# Altium PCB HygroPCB.PcbDoc
Units mil, origin at the board's own origin, x right, y up, seen from the top; angles counter-clockwise.
Board outline 1945 x 1130 mil, 2 copper layers (Top Layer, Bottom Layer); 5 components, 8 nets, 28 pads, 0 vias.
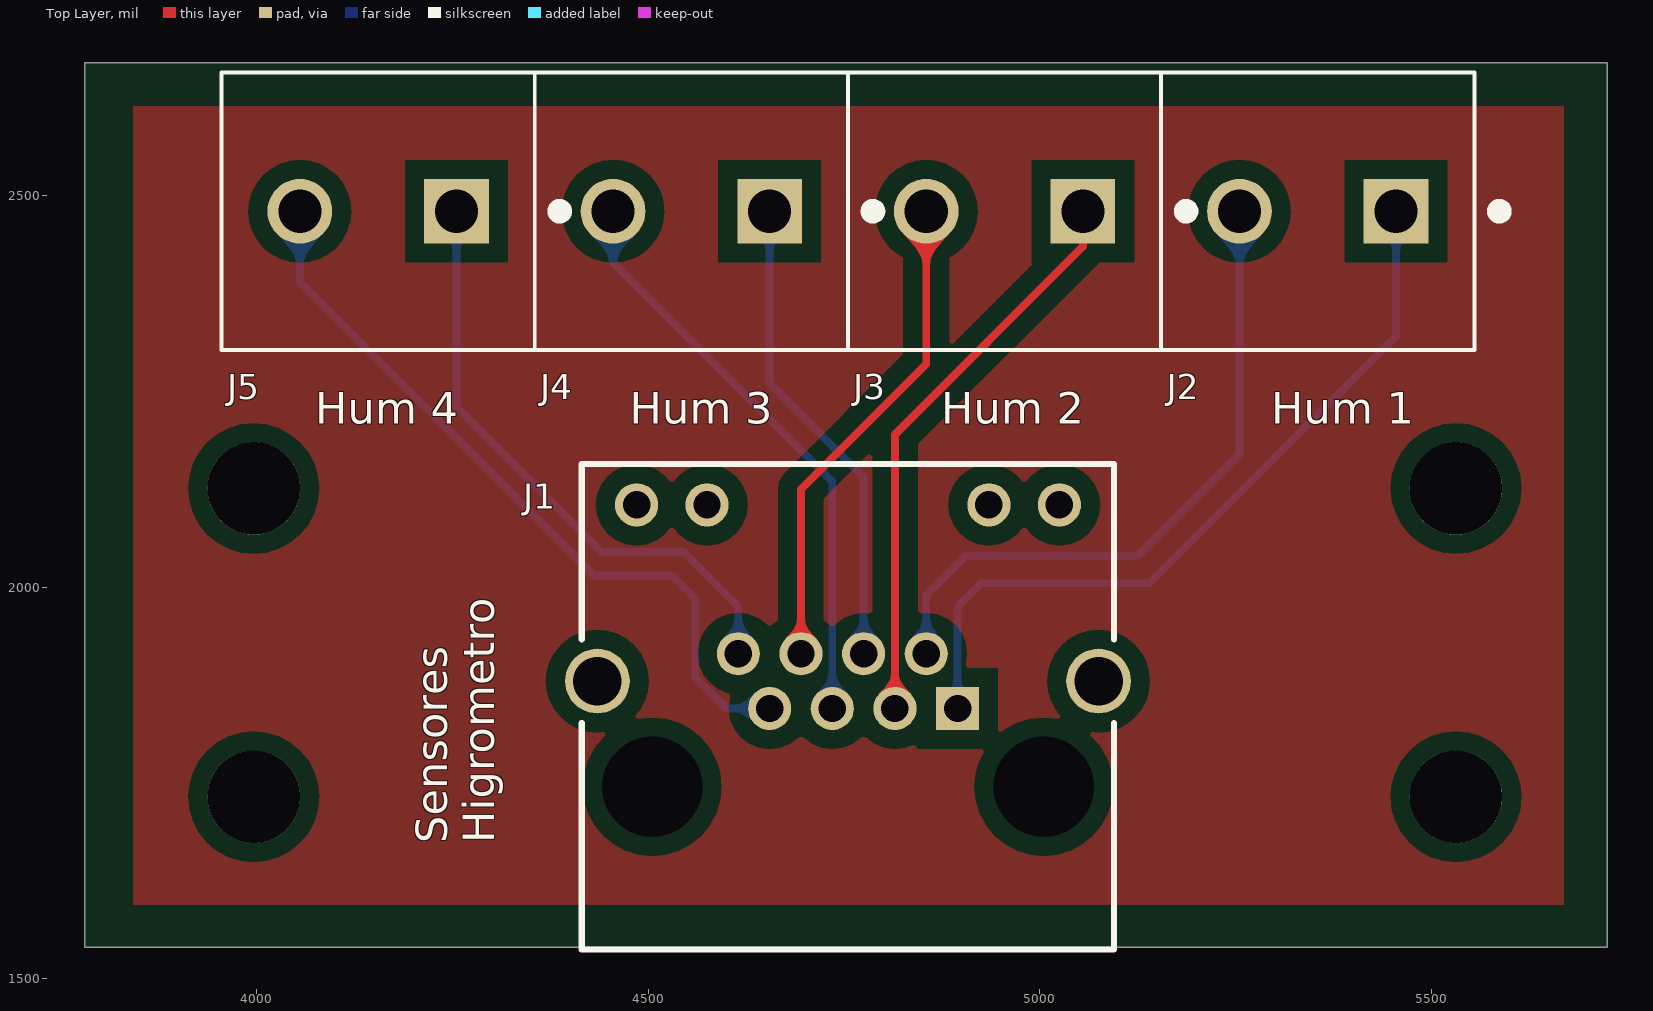
[diagram p0: Top Layer view]
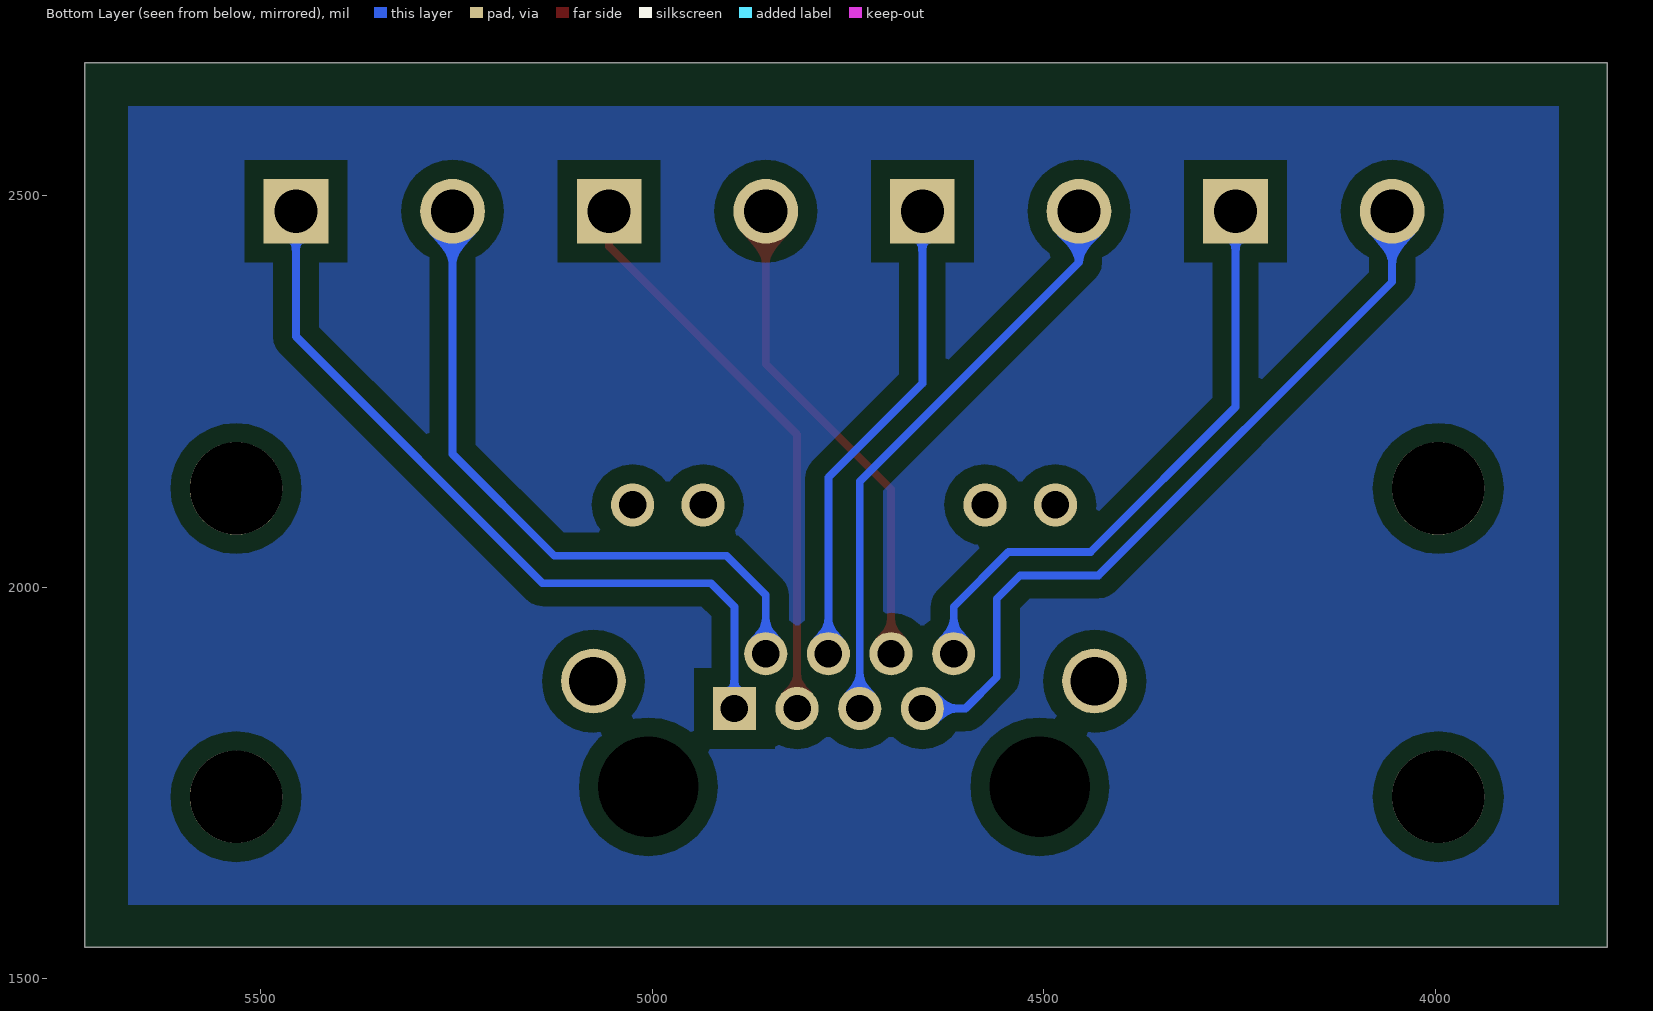
[diagram p1: Bottom Layer view, seen from below]
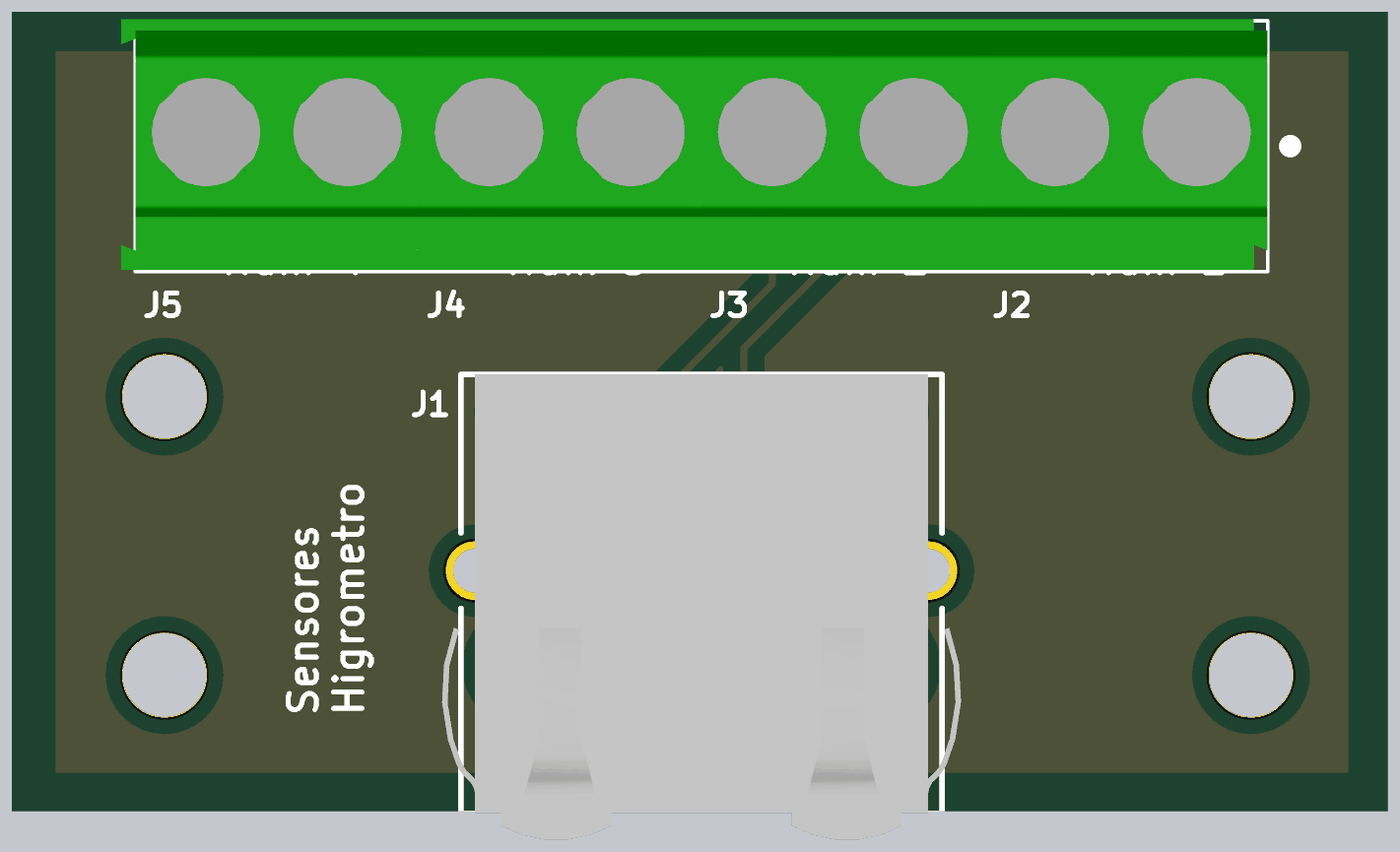
[diagram p2: 3D render of the assembled board from above, using the file's embedded part models]

## Layer stack, top to bottom
Top Solder: solder mask 0.4, Solder Resist, Dk 3.5
Top Layer: signal copper 1.4
Dielectric 1: dielectric 12.6, FR-4, Dk 4.8
Bottom Layer: signal copper 1.4
Bottom Solder: solder mask 0.4, Solder Resist, Dk 3.5

## Board outline
3780,1540 3780,2670 5725,2670 5725,1540

## Design rules (kind name [scope] priority, off if disabled: settings)
Clearance [All] p1: gap=6 except(24: Arc-Poly Track-Poly SMDPad-Poly THPad-Poly Via-Poly Fill-Poly Poly-Poly)
DiffPairsRouting [All] p1: maxlimit=10 minlimit=10 mostfreqgap=10 toplayer_minwidth=10 toplayer_maxwidth=15 toplayer_prefwidth=15 bottomlayer_minwidth=10 bottomlayer_maxwidth=15 bottomlayer_prefwidth=15 maxuncoupledlength=500
HoleSize [All] p1: absolutevalues=TRUE maxlimit=300 minlimit=1 maxpercent=80.000 minpercent=20.000
MinimumSolderMaskSliver [All] p1: minsoldermaskwidth=0
PlaneClearance [All] p1: clearance=32
PolygonConnect [All] p1: connectstyle=Relief reliefconductorwidth=10 reliefentries=4 polygonreliefangle="90 Angle" airgapwidth=10
RoutingTopology [All] p1: topology=Daisy_Simple
RoutingVias [All] p1: holewidth=28 width=50 viastyle="Through Hole" minholewidth=28 minwidth=50 maxholewidth=40 maxwidth=60
SilkToSilkClearance [All] p1: silktosilkclearance=0
SilkToSolderMaskClearance [IsPad] p1: minsilkscreentomaskgap=0 clearancetoexposedcopper=TRUE
SolderMaskExpansion SolderMaskExpansion_1 [IsVia] p1: expansion=0 soldermaskfromhole=TRUE
SolderMaskExpansion [All] p2: expansion=4
UnpouredPolygon [All] p1: allowunpoured=TRUE allowshelved=TRUE
Width [All] p1: maxlimit=40 minlimit=8 preferedwidth=16
22 further rules are at their usual default settings.

## Components (designator, comment, footprint, x,y, rotation, side; value= is the part's Value field where it differs from the comment)
J1 "2-406549-1" TECO-2-406549-1_V 4755,1880 r0 top
J2 "282841-2" TE_282841-2 5355,2480 r180 top
J3 "282841-2" TE_282841-2 4955,2480 r180 top
J4 "282841-2" TE_282841-2 4555,2480 r180 top
J5 "282841-2" TE_282841-2 4155,2480 r180 top

## Footprints (in the part's own frame and the unit in brackets; to place one, negate y for a bottom-side part, rotate by r counter-clockwise, add the part's x,y. Pads: shape width x height; smd on the part's side, far side on the other; paste and mask are expansions set on the pad)
TE_282841-2 [mm]
  rect 2.1x2.1 hole 1.4: 1(-2.54,0)
  round 2.1 hole 1.4: 2(2.54,0)
  silkscreen extent -6.09,-4.5 5.08,4.5, body extent -5.08,-4.55 5.58,4.45, height 15.21
TECO-2-406549-1_V [mm] "Connector, 12-Leads, Body 17.27x15.75mm, Pitch 1.016mm"
  rect 1.4x1.4 hole 0.89: 1(3.556,-0.889)
  round 1.4 hole 0.89: 2(2.54,0.889) 3(1.524,-0.889) 4(0.508,0.889) 5(-0.508,-0.889) 6(-1.524,0.889) 7(-2.54,-0.889) 8(-3.556,0.889) 9(-4.572,5.715) 10(-6.858,5.715) 11(6.858,5.715) 12(4.572,5.715)
  round 0 hole 3.251 unplated: MH1(6.35,-3.429) MH2(-6.35,-3.429)
  round 2.1 hole 1.575: S1(8.128,0) S2(-8.128,0)
  silkscreen extent -8.63,-8.71 8.63,7.04, body extent -9.32,-9.68 9.32,7.04, height 14.61

## Part data
J1: library part CMP-2000-05541-1, "RJ45 Connector, Pitch 1.016 mm, 8 Position, Height 14.22 mm, Tail Length 3.18 mm, RoHS, Tray"
J2 J3 J4 J5: "Conn Terminal Block 2 POS 5.08mm Solder ST Thru-Hole 17.5A/Contact"

## Free pads (board coordinates)
  round 118.11 hole 118.11: ""(3996.06,1732.28) ""(3996.06,2125.98) ""(5531.5,1732.28) ""(5531.5,2125.98)

## Nets (pads, with @x,y where several pads share a name; then routed paths per layer and width w, separated by ;. In a path a pad name is that pad's centre, name@x,y a point inside that pad or via, vN(x,y) a via of type N, cw(c..) or ccw(c..) an arc to the next point about the centre after c; other vN are vias at no path point)
H_IN_N_1: J1.2 J2.2 | length 859.6
  Bottom Layer w10: J1.2 4855,1990 4905,2040 5125,2040 5255,2170 J2.2
H_IN_N_2: J1.6 J3.2 | length 631.3
  Top Layer w10: J1.6 4695,2125 4855,2285 J3.2
H_IN_N_3: J1.4 J4.1 | length 614.7
  Bottom Layer w10: J4.1 4655,2260 4775,2140 J1.4
H_IN_N_4: J1.8 J5.1 | length 775.6
  Bottom Layer w10: J5.1 4255,2230 4440,2045 4545,2045 4615,1975 J1.8
H_IN_P_1: J1.1 J2.1 | length 992.9
  Bottom Layer w10: J1.1 4895,1975 4925,2005 5140,2005 5455,2320 J2.1
H_IN_P_2: J1.3 J3.1 | length 734.4
  Top Layer w10: J1.3 4815,2195 5055,2435 J3.1
H_IN_P_3: J1.5 J4.2 | length 751
  Bottom Layer w10: J4.2 4455,2415 4735,2135 J1.5
H_IN_P_4: J1.7 J5.2 | length 974.3
  Bottom Layer w10: J5.2 4055,2390 4430,2015 4530,2015 4560,1985 4560,1885 4600,1845 J1.7
pads on no net: J1.9 J1.10 J1.11 J1.12 J1.MH1 J1.MH2 J1.S1 J1.S2

## Polygon pours and split planes (outlines as drawn)
no net on Top Layer "GroundPlaneT" (solid, pour order 0): 3842.52,2614.17 3842.52,1594.49 5669.29,1594.49 5669.29,2614.17 5551.18,2614.17
no net on Bottom Layer "GroundPlaneT" (solid, pour order 2): 3842.52,2614.17 3842.52,1594.49 5669.29,1594.49 5669.29,2614.17 5551.18,2614.17

## Silkscreen, mask and mechanical layers (free items; w line width, h text height)
Top Overlay:
  text "Hum 4" at 4074.8,2208.66 h40
  text "Hum 3" at 4476.38,2208.66 h40
  text "Hum 2" at 4874.02,2208.66 h40
  text "Hum 1" at 5295.28,2208.66 h40
  text "Sensores / Higrometro" at 4303.15,1673.23 h40 r90
Mechanical 1:
  the board outline again, w6

## Dimensions
3996.06,1732.28 to 3996.06,2125.98 on Mechanical 13
3996.06,1732.28 to 3780,1540 on Mechanical 13
3996.06,1732.28 to 5531.5,1732.28 on Mechanical 13
3996.06,1732.28 to 3780,1540 on Mechanical 13
5725,2670 to 5725,1540 on Mechanical 13
3780,2670 to 5725,2670 on Mechanical 13